# Altium PCB TS4.PcbDoc
Units mm, origin at the board's own origin, x right, y up, seen from the top; angles counter-clockwise.
Board outline 32.65 x 73.25 mm, 2 copper layers (Top Layer, Bottom Layer), stack 0.325 mm thick; 120 components, 74 nets, 374 pads, 130 vias.
Unrouted connection lines stored in the file: 2.
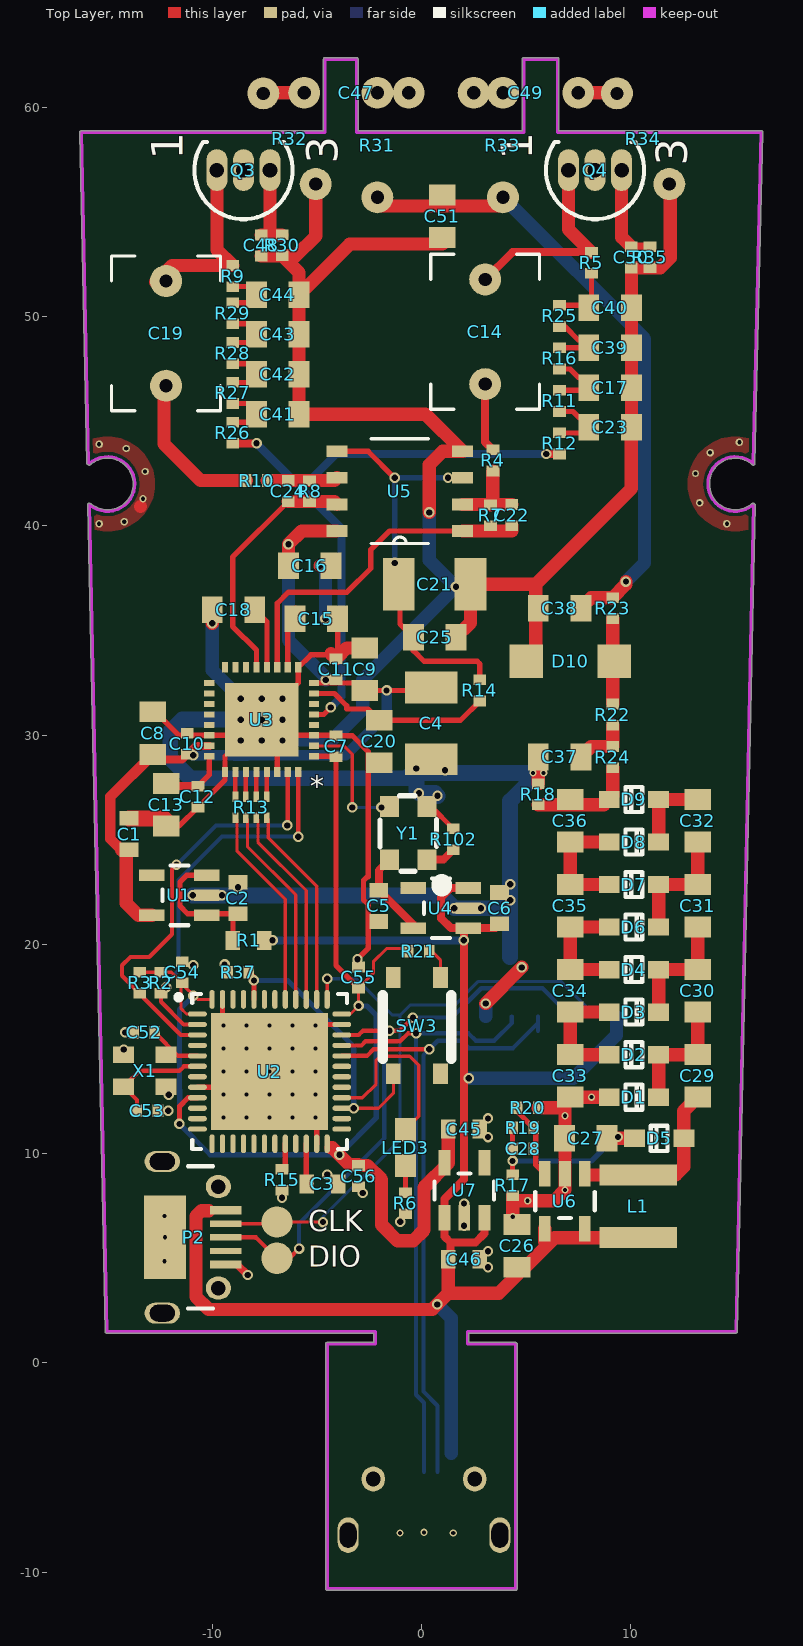
[diagram p0: Top Layer view]
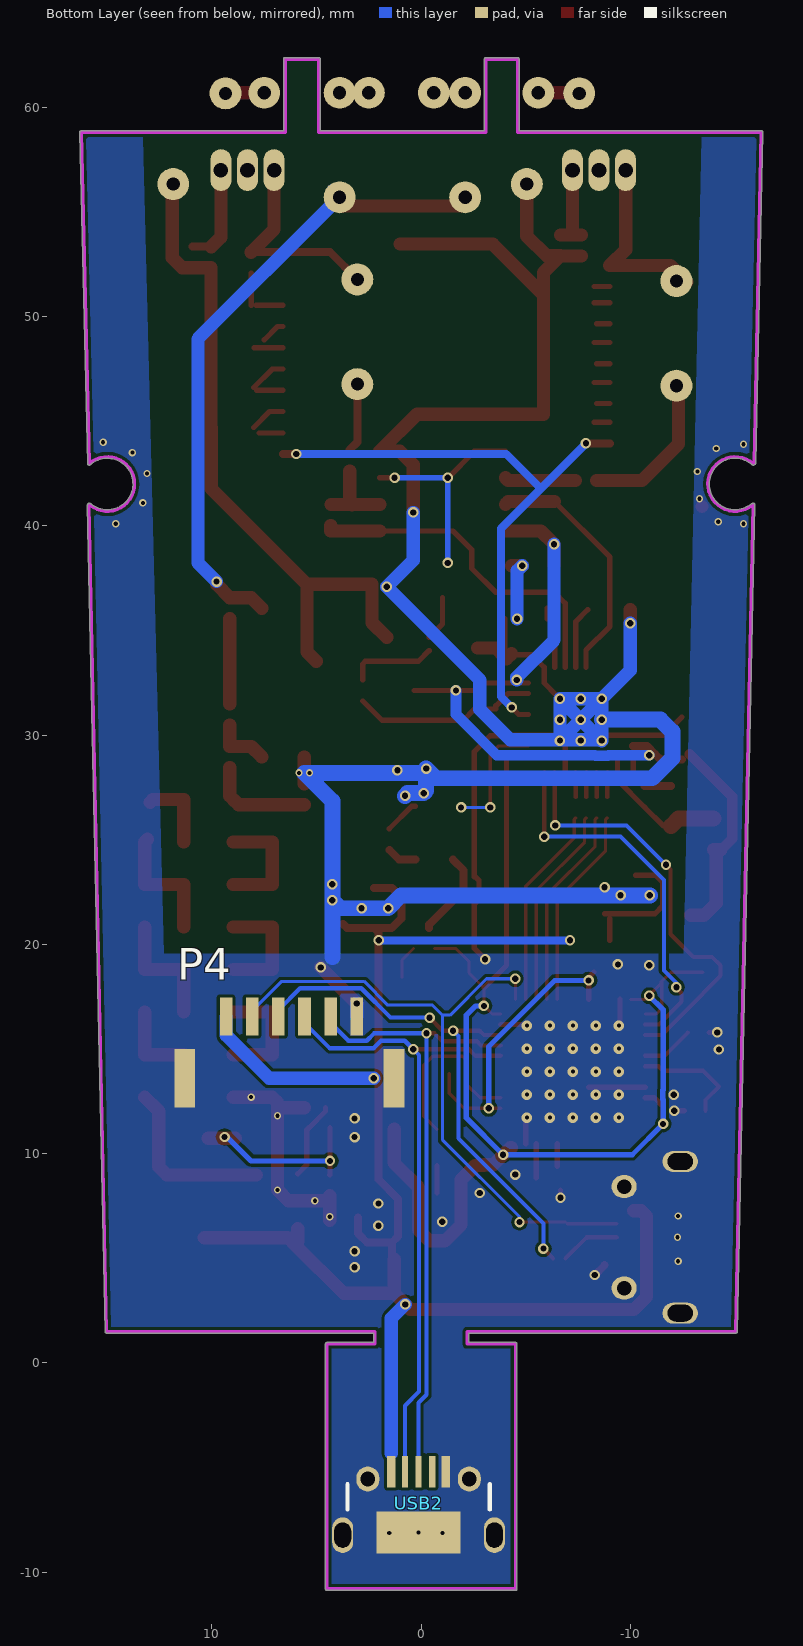
[diagram p1: Bottom Layer view, seen from below]

## Layer stack, top to bottom
Top Solder: solder mask 0.0102, Solder Resist, Dk 3.5
Top Layer: signal copper 0.0356
Dielectric 1: core 0.254, FR-4, Dk 4.2
Bottom Layer: signal copper 0.0356
Bottom Solder: solder mask 0.0102, Solder Resist, Dk 3.5

## Board outline
-4.577,0.9 cw(c-4.5,0.9) -4.5,0.977 -2.277,0.977 -2.277,1.423 -15.032,1.423 cw(c-15.032,1.5) -15.108,1.499 -15.108,1.498 -15.108,1.499 -15.948,41.001 cw(c-15.871,41.003) -15.83,41.067 cw(c-15.829,40.99) -15.78,41.049 ccw(c-15,42) -13.77,42 ccw(c-15,42) -15.812,42.924 cw(c-15.862,42.981) -15.915,42.926 cw(c-15.907,43.002) -15.983,43 -16.33,58.798 cw(c-16.254,58.8) -16.254,58.877 -4.677,58.877 -4.677,62.3 cw(c-4.6,62.3) -4.6,62.377 -3.1,62.377 cw(c-3.1,62.3) -3.023,62.3 -3.023,58.877 4.823,58.877 4.823,62.3 cw(c4.9,62.3) 4.9,62.377 6.5,62.377 cw(c6.5,62.3) 6.577,62.3 6.577,58.877 16.246,58.877 cw(c16.246,58.8) 16.323,58.8 cw(c16.246,58.8) 16.323,58.798 cw(c16.246,58.8) 16.323,58.798 15.939,42.98 ccw(c15.862,42.981) 15.939,42.981 15.939,42.98 15.939,42.979 ccw(c15.862,42.981) 15.939,42.98 15.939,42.979 cw(c15.862,42.981) 15.812,42.924 ccw(c15,42) 15.789,41.056 cw(c15.838,40.998) 15.856,41.072 cw(c15.871,40.997) 15.948,40.997 cw(c15.871,40.997) 15.948,40.995 15.108,1.499 ccw(c15.032,1.5) 15.108,1.5 15.108,1.499 15.108,1.498 15.108,1.499 cw(c15.032,1.5) 15.032,1.423 2.277,1.423 2.277,0.977 4.5,0.977 cw(c4.5,0.9) 4.577,0.9 4.577,-10.795 cw(c4.5,-10.795) 4.5,-10.872 -4.5,-10.872 cw(c-4.5,-10.795) -4.577,-10.795

## Design rules (kind name [scope] priority, off if disabled: settings)
Clearance Clearance_1 [(InNamedPolygon('Bottom Layer-No Net')) vs Not InNet('GND')] p1: gap=0.381 ignorepadtopadclearanceinfootprint=FALSE except(0: Arc-Hole Track-Hole SMDPad-Hole THPad-Hole Via-Hole Fill-Hole Poly-Hole Region-Hole Text-Hole)
Clearance [All] p2: gap=0.152 ignorepadtopadclearanceinfootprint=FALSE except(0: Arc-Hole Track-Hole SMDPad-Hole THPad-Hole Via-Hole Fill-Hole Poly-Hole Region-Hole Text-Hole)
DiffPairsRouting [All] p1: maxlimit=0.254 minlimit=0.254 mostfreqgap=0.254 toplayer_minwidth=0.152 toplayer_maxwidth=0.381 toplayer_prefwidth=0.381 bottomlayer_minwidth=0.152 bottomlayer_maxwidth=0.381 bottomlayer_prefwidth=0.381 maxuncoupledlength=12.7
HoleSize [All] p1: absolutevalues=TRUE maxlimit=3.048 minlimit=0.025 maxpercent=80.000 minpercent=20.000
MinimumSolderMaskSliver [All] p1 off: minsoldermaskwidth=0.254
PlaneClearance [All] p1: clearance=0.254
PlaneConnect [All] p1: planeconnectstyle=Direct reliefexpansion=0.508 reliefentries=4 reliefconductorwidth=0.254 reliefairgap=0.254
PolygonConnect [All] p1: connectstyle=Direct reliefconductorwidth=0.254 reliefentries=4 polygonreliefangle="90 Angle" airgapwidth=0.254
RoomDefinition POL&JFET [InComponentClass('POL&JFET')] p1 off: confinementstyle=ConfineIn formatcopy=TRUE lockcomponents=FALSE outline 17.844,-18.462 174.593,-18.462 174.593,-8.712 17.844,-8.712
RoomDefinition audio [InComponentClass('audio')] p2 off: confinementstyle=ConfineIn formatcopy=TRUE lockcomponents=FALSE outline -84.156,6.538 -71.156,6.538 -71.156,16.288 -84.156,16.288
RoomDefinition power [InComponentClass('power')] p3 off: confinementstyle=ConfineIn formatcopy=TRUE lockcomponents=FALSE outline -84.156,24.788 -56.406,24.788 -56.406,32.038 -84.156,32.038
RoomDefinition MCU [InComponentClass('MCU')] p4 off: confinementstyle=ConfineIn formatcopy=TRUE lockcomponents=FALSE outline -71.652,7.294 -12.089,7.294 -12.089,13.39 -71.652,13.39
RoutingVias [All] p1: holewidth=0.305 width=0.508 viastyle="Through Hole" minholewidth=0.3 minwidth=0.5 maxholewidth=0.711 maxwidth=1.27
SilkToBoardRegionClearance [All] p1 off:
SilkToSilkClearance [All] p1 off: silktosilkclearance=0.254
SilkToSolderMaskClearance [IsPad] p1 off: minsilkscreentomaskgap=0.254 clearancetoexposedcopper=TRUE
SolderMaskExpansion [All] p1: expansion=0.102
Width [All] p1: maxlimit=1.524 minlimit=0.152 preferedwidth=0.152
22 further rules are at their usual default settings.

## Classes and differential pairs
component class audio: C7 C8 C9 C10 C11 C12 C13 C14 C15 C16 C17 C18 C19 C20 C21 C22 C23 C24 C25 C39 C40 C41 C42 C43 C44 R2 R3 R4 R5 R7 R8 R9 R10 R11 R12 R14 R16 R25 R26 R27 R28 R29 R102 U3 U5 Y1
component class MCU: C3 C52 C53 C54 C55 C56 LED3 P2 P4 R6 R13 R15 R21 R37 SW3 U2 USB2 X1
component class power: C1 C2 C4 C5 C6 C45 C46 R1 U1 U4 U7
component class POL&JFET: C26 C27 C28 C29 C30 C31 C32 C33 C34 C35 C36 C37 C38 C47 C48 C49 C50 C51 D1 D2 D3 D4 D5 D6 D7 D8 D9 D10 L1 Q3 Q4 R17 R18 R19 R20 R22 R23 R24 R30 R31 R32 R33 R34 R35 U6

## Components (designator, comment, footprint, x,y, rotation, side; value= is the part's Value field where it differs from the comment)
C1 "4.7uF" 0603L -13.97,25.273 r270 top
C2 "4.7uF" 0603L -8.767,22.215 r270 top
C3 "Cap" 0603L -4.728,8.55 r180 top value=4.7uF
C4 "220uF,Tan" 1210 0.472,30.56 r90 top
C5 "4.7uF" 0603L -2.032,21.844 r90 top
C6 "4.7uF" 0603L 3.737,21.727 r270 top
C7 "0.1uF" 0402 -4.074,29.468 r270 top
C8 "4.7uF" 0805 -12.827,30.099 r270 top
C9 "4.7uF" 0805 -2.703,33.151 r270 top
C10 "0.1uF" 0402 -11.186,29.595 r270 top
C11 "0.1uF" 0402 -4.074,33.151 r270 top
C12 "0.1uF" 0402 -10.678,27.055 r90 top
C13 "4.7uF" 0805 -12.192,26.67 r90 top
C14 "10uF" CL21-5mm-1F 3.048,49.276 r90 top
C15 "10uF" 0805 -5.014,35.564 r0 top
C16 "4.7uF" 0805 -5.334,38.1 r180 top
C17 "4.7uF" 0805 9.017,46.609 r180 top
C18 "10uF" 0805 -8.976,35.995 r0 top
C19 "10uF" CL21-5mm-1F -12.2,49.2 r90 top
C20 "4.7uF" 0805 -2.017,29.696 r90 top
C21 "200uF" 1210 0.635,37.211 r180 top
C22 "NC" 0402 4.318,40.513 r90 top
C23 "4.7uF" 0805 9.017,44.704 r180 top
C24 "100k" 0402 -6.36,41.66 r90 top
C25 "4.7uF" 0805 0.635,34.671 r180 top
C26 "2.2uF" 0805 4.572,5.588 r270 top
C27 "2.2uF" 0805 7.866,10.732 r0 top
C28 "470pf" 0402 4.866,10.232 r180 top
C29 "2.2uF" 0805 13.208,13.716 r90 top
C30 "2.2uF" 0805 13.208,17.78 r90 top
C31 "2.2uF" 0805 13.208,21.844 r90 top
C32 "2.2uF" 0805 13.208,25.908 r90 top
C33 "2.2uF" 0805 7.112,13.716 r90 top
C34 "2.2uF" 0805 7.112,17.78 r90 top
C35 "2.2uF" 0805 7.112,21.844 r90 top
C36 "2.2uF" 0805 7.112,25.908 r90 top
C37 "2.2uF" 0805 6.604,28.956 r0 top
C38 "2.2uF" 0805 6.604,36.068 r0 top
C39 "4.7uF" 0805 9.017,48.514 r180 top
C40 "4.7uF" 0805 9.017,50.419 r180 top
C41 "4.7uF" 0805 -6.858,45.339 r180 top
C42 "4.7uF" 0805 -6.858,47.244 r180 top
C43 "4.7uF" 0805 -6.858,49.149 r180 top
C44 "4.7uF" 0805 -6.858,51.054 r180 top
C45 "4.7uF" 0603L 2.042,11.172 r180 top
C46 "4.7uF" 0603L 2.042,4.949 r180 top
C47 "470pF/1nF/2.2nF" CL21-5mm-1A -3.1,60.7 r180 top
C48 "NC" 0402 -7.652,53.403 r270 top
C49 "470pF/1nF/2.2nF" CL21-5mm-1A 5,60.7 r0 top
C50 "NC" 0402 10.033,52.832 r270 top
C51 "2.2uF" 0805 1,54.8 r90 top
C52 "Cap" 0402 -13.251,15.791 r0 top value=20pF
C53 "Cap" 0402 -13.085,12.055 r180 top value=20pF
C54 "Cap" 0402 -11.43,18.669 r270 top value=0.1uF
C55 "Cap" 0402 -3.001,18.422 r270 top value=0.1uF
C56 "Cap" 0402 -3.001,8.922 r90 top value=0.1uF
D1 "Diode 1N4148" LC-SOD-323 10.16,12.7 r180 top
D2 "Diode 1N4148" LC-SOD-323 10.16,14.732 r0 top
D3 "Diode 1N4148" LC-SOD-323 10.16,16.764 r180 top
D4 "Diode 1N4148" LC-SOD-323 10.16,18.796 r0 top
D5 "Diode 1N4148" LC-SOD-323 11.366,10.732 r0 top
D6 "Diode 1N4148" LC-SOD-323 10.16,20.828 r180 top
D7 "Diode 1N4148" LC-SOD-323 10.16,22.86 r0 top
D8 "Diode 1N4148" LC-SOD-323 10.16,24.892 r180 top
D9 "Diode 1N4148" LC-SOD-323 10.16,26.924 r0 top
D10 "D Zener" SMA 7.112,33.528 r0 top
L1 "Inductor Iron Dot" L4015 10.366,5.982 r90 top value=10uH
LED3 "LED0" 0603 -0.758,10.297 r270 top
P2 "SWD_MicroUSB" MICRO-YZX -15.2,6 r270 top
P4 "JTAG-6P" GH1.25-6 6.2,15.1 r180 bottom
Q3 "JFET-N" TO-92 -8.5,57 r90 top
Q4 "JFET-N" TO-92 8.3,57 r90 top
R1 "FB" 0603L -8.255,20.193 r0 top value=0Ohm
R2 "Res2" 0402 -12.446,18.161 r90 top value=10k
R3 "Res2" 0402 -13.462,18.161 r90 top value=10k
R4 "1k" 0402 3.419,43.133 r270 top
R5 "NC" 0402 8.128,52.578 r270 top
R6 "10k" 0402 -0.758,7.63 r270 top value=0Ohm
R7 "100k" 0402 3.302,40.513 r270 top
R8 "NC" 0402 -5.344,41.66 r270 top
R9 "NC" 0402 -9.017,51.943 r270 top
R10 "1k" 0402 -7.874,42.164 r0 top
R11 "250-300R" 0402 6.604,45.974 r270 top
R12 "250-300R" 0402 6.604,43.942 r270 top
R13 "Res*4" 0402X4 -8.138,26.547 r270 top value=200Ohm
R14 "NC" 0402 2.794,32.131 r90 top
R15 "10k" 0402 -6.658,8.753 r270 top value=0Ohm
R16 "250-300R" 0402 6.604,48.006 r270 top
R17 "" 0402 4.366,8.482 r90 top value=10k
R18 "" 0402 5.588,27.178 r270 top value=5M
R19 "" 0402 4.866,11.232 r180 top value=10k
R20 "" 0402 5.08,12.192 r180 top value=10k
R21 "1k" 0402 -0.131,19.675 r180 top value=0Ohm
R22 "" 0402 9.144,30.988 r270 top value=100k
R23 "" 0402 9.144,36.068 r270 top value=1M
R24 "" 0402 9.144,28.956 r270 top value=100k
R25 "250-300R" 0402 6.604,50.038 r270 top
R26 "250-300R" 0402 -9.017,44.45 r270 top
R27 "250-300R" 0402 -9.017,46.355 r270 top
R28 "250-300R" 0402 -9.017,48.26 r270 top
R29 "250-300R" 0402 -9.017,50.165 r270 top
R30 "" 0402 -6.652,53.403 r90 top value=1k
R31 "" R-1G -2.1,58.2 r270 top value=1G
R32 "" R-1G -6.3,58.5 r120 top value=1G
R33 "" R-1G 3.9,58.2 r270 top value=1G
R34 "" R-1G 10.6,58.5 r120 top value=1G
R35 "" 0402 10.922,52.832 r90 top value=1k
R37 "Res2" 0402 -8.751,18.672 r180 top value=10k
R102 "NC" 0402 1.524,25.019 r90 top
SW3 "SW-PB" SW3x4 -0.213,16.119 r90 top
U1 "LP5907" SOT23-5 -11.561,22.342 r90 top
U2 "STM32F401CCU6" STM-UFQFPN48_N -7.251,13.922 r0 top
U3 "ADAU1761" ADAU1761 -7.63,30.738 r180 top
U4 "LP5907" SOT23-5 0.943,21.727 r90 top
U5 "OP-2" SO8 -1.026,41.66 r180 top
U6 "LM27313XMF/NOPB" SOT23-5 6.866,7.732 r180 top value=Value
U7 "LP5907" SOT23-5 2.055,8.24 r0 top
USB2 "USB Micro Type B" MICRO-YZX 0.127,-11.049 r180 bottom
X1 "24.000 KHz 3.2x2.5mm 8-10pf" OSCILLATOR-2.5x2.0 -13.212,13.96 r180 top
Y1 "OSC_40M" TXC_7Q -0.625,25.32 r90 top

## Footprints (in the part's own frame and the unit in brackets; to place one, negate y for a bottom-side part, rotate by r counter-clockwise, add the part's x,y. Pads: shape width x height; smd on the part's side, far side on the other; paste and mask are expansions set on the pad)
0402 [mil] "0402-RES"
  rect 20x24 smd: 1(-19.68,0) 2(20,0)
0402X4 [mm]
  rect 0.5x0.28 smd: 1(-0.5,0.75) 2(-0.5,0.25) 3(-0.5,-0.25) 4(-0.5,-0.75) 5(0.5,-0.75) 6(0.5,-0.25) 7(0.5,0.25) 8(0.5,0.75)
0603 [mil] "0603-RES"
  rect 44x40 smd: 1(-33.46,0) 2(34,0)
  body extent -31,-16 31,16, height 31
0603L [mm]
  rect 0.7x0.9 smd: 1(-0.75,0) 2(0.75,0)
  body extent -0.8,-0.4 0.8,0.4, height 0.8
0805 [mm]
  rect 1x1.27 smd: 1(-1.016,0) 2(1.016,0)
  body extent -1.27,-0.76 1.27,0.76, height 0.8
1210 [mm]
  rect 1.52x2.5 smd: 1(-1.715,0) 2(1.715,0)
ADAU1761 [mm]
  rect 3.5x3.5 smd: 0(0,0)
  rect 0.5x0.3 smd: 1(-2.5,1.75) 2(-2.5,1.25) 3(-2.5,0.75) 4(-2.5,0.25) 5(-2.5,-0.25) 6(-2.5,-0.75) 7(-2.5,-1.25) 8(-2.5,-1.75) 17(2.5,-1.75) 18(2.5,-1.25) 19(2.5,-0.75) 20(2.5,-0.25) 21(2.5,0.25) 22(2.5,0.75) 23(2.5,1.25) 24(2.5,1.75)
  rect 0.3x0.5 smd: 9(-1.75,-2.5) 10(-1.25,-2.5) 11(-0.75,-2.5) 12(-0.25,-2.5) 13(0.25,-2.5) 14(0.75,-2.5) 15(1.25,-2.5) 16(1.75,-2.5) 25(1.75,2.5) 26(1.25,2.5) 27(0.75,2.5) 28(0.25,2.5) 29(-0.25,2.5) 30(-0.75,2.5) 31(-1.25,2.5) 32(-1.75,2.5)
  body extent -2.5,-2.5 2.5,2.5, height 0.8
CL21-5mm-1A [mil]
  round 60 hole 25: 1(-98.43,0) 2(98.43,0)
  body extent -142,-47 142,47, height 394
CL21-5mm-1F [mil]
  round 60 hole 25: 1(-98.43,0) 2(98.43,0)
  silkscreen extent -146,-102 146,102, body extent -142,-98 142,98, height 394
GH1.25-6 [mm]
  rect 1x2.8 smd: 0(-5.1,-1.5) 0(4.9,-1.5)
  rect 0.6x1.8 smd: 1(-3.125,1.45) 2(-1.875,1.45) 3(-0.625,1.45) 4(0.625,1.45) 5(1.875,1.45) 6(3.125,1.45)
  body extent -5.48,-3.1 5.27,1.75, height 4.25
L4015 [mm]
  rect 1x3.7 smd: 1(0,0) 2(3,0)
LC-SOD-323 [mm]
  rect 1x0.83 smd: 1(1.18,0) 2(-1.18,0)
  silkscreen extent -0.4,-0.6 0.4,0.6, body extent -1.35,-0.62 1.35,0.63, height 1.1
MICRO-YZX [mm]
  rect 0.4x1.5 smd: 1(-1.3,5.85) 5(1.3,5.85)
  rect 0.3x1.5 smd: 2(-0.65,5.85) 3(0,5.85) 4(0.65,5.85)
  oval 1x1.7 hole 0.8 slot 1.2 at 90 deg: 5(-3.625,2.82) 5(3.625,2.82)
  oval 1.1x1.2 hole 0.7: 5(-2.425,5.5) 5(2.425,5.5)
  rect 4x2 smd: 5(0,2.95)
  silkscreen extent -3.4,4.05 3.4,5.25, body extent -4.02,0.33 3.98,5.93, height 2.6
OSCILLATOR-2.5x2.0 [mm] "OSCILLATOR-3.2X2.5"
  rect 1x0.8 smd: 1(-1.016,-0.762) 2(1.016,-0.762) 3(1.016,0.762) 4(-1.016,0.762)
  body extent -1.27,-1.02 1.27,1.02, height 0.9
R-1G [mil]
  round 60 hole 25: 1(-98.43,0) 2(98.43,0)
  body extent -142,-47 142,47, height 394
SMA [mm]
  rect 1.6x1.6 smd: 1(-2.1,0) 2(2.1,0)
  body extent -2.1,-1.3 2.1,1.3, height 2.3
SO8 [mm]
  rect 1x0.559 smd: 1(-3,1.905) 2(-3,0.635) 3(-3,-0.635) 4(-3,-1.905) 5(3,-1.905) 6(3,-0.635) 7(3,0.635) 8(3,1.905)
  silkscreen extent -1.37,-2.5 1.37,2.5, body extent -3,-2.45 3,2.45, height 1.63
SOT23-5 [mil] "SOT23-5"
  rect 22x48 smd: 1(-37.4,-51.19) 2(0,-51.19) 3(38,-51.19) 4(38,52) 5(-37.4,52)
  silkscreen extent -56,-17 56,32
STM-UFQFPN48_N [mm] "QFN, 48-Leads, Body 7.1x7.1mm, Pitch 0.5mm, Thermal Pad 5.6x5.6mm, IPC Medium Density"
  oval 0.9x0.25 smd: 1(-3.45,2.75) 2(-3.45,2.25) 3(-3.45,1.75) 4(-3.45,1.25) 5(-3.45,0.75) 6(-3.45,0.25) 7(-3.45,-0.25) 8(-3.45,-0.75) 9(-3.45,-1.25) 10(-3.45,-1.75) 11(-3.45,-2.25) 12(-3.45,-2.75) 25(3.45,-2.75) 26(3.45,-2.25) 27(3.45,-1.75) 28(3.45,-1.25) 29(3.45,-0.75) 30(3.45,-0.25) 31(3.45,0.25) 32(3.45,0.75) 33(3.45,1.25) 34(3.45,1.75) 35(3.45,2.25) 36(3.45,2.75)
  oval 0.25x0.9 smd: 13(-2.75,-3.45) 14(-2.25,-3.45) 15(-1.75,-3.45) 16(-1.25,-3.45) 17(-0.75,-3.45) 18(-0.25,-3.45) 19(0.25,-3.45) 20(0.75,-3.45) 21(1.25,-3.45) 22(1.75,-3.45) 23(2.25,-3.45) 24(2.75,-3.45) 37(2.75,3.45) 38(2.25,3.45) 39(1.75,3.45) 40(1.25,3.45) 41(0.75,3.45) 42(0.25,3.45) 43(-0.25,3.45) 44(-0.75,3.45) 45(-1.25,3.45) 46(-1.75,3.45) 47(-2.25,3.45) 48(-2.75,3.45)
  rect 5.6x5.6 smd: 49(0,0)
  silkscreen extent -4.47,-3.7 3.7,3.7, body extent -3.55,-3.55 3.55,3.55, height 0.6
SW3x4 [mm]
  rect 1x0.7 smd: 1(-2.3,1.125) 2(2.3,-1.125) 3(2.3,1.125) 4(-2.3,-1.125)
  silkscreen extent -1.58,-1.65 1.45,1.63, body extent -2,-1.5 2,1.5, height 2.6
TO-92 [mm] "TO, Flat Index; 3 In-Line, Axial Leads; Body Dia. 4.6mm; Leads 0.41 x 0.39 mm (max)"
  oval 2x1 hole 0.7: 1(0,1.27) 2(0,0) 3(0,-1.27)
  silkscreen extent -2.34,-2.34 1.35,2.34
TXC_7Q [mm]
  rect 1x0.9 smd: 1(-1.275,-0.9) 2(1.275,-0.9) 3(1.275,0.9) 4(-1.275,0.9)
  silkscreen extent -2.52,-1.6 1.78,1.35

## Part data
C1 C2 C4 C5 C6 C7 C8 C9 C10 C11 C12 C13 C14 C15 C16 C17 C18 C19 C20 C21 C22 C23 C24 C25 C39 C40 C41 C42 C43 C44 C45 C46 C47 C48 C49 C50: library part Cap, "Capacitor", LatestRevisionDate=17-Jul-2002, LatestRevisionNote="Re-released for DXP Platform.", PackageDescription="Radial Cap, Thru-Hole; 2 Leads; 0.3 in Pin Spacing", PackageReference=RAD-0.3, Published=8-Jun-2000, Publisher="Altium Limited"
C3 C52 C53 C54 C55 C56: "Capacitor", LatestRevisionDate=17-Jul-2002, LatestRevisionNote="Re-released for DXP Platform.", PackageDescription="Radial Cap, Thru-Hole; 2 Leads; 0.3 in Pin Spacing", PackageReference=RAD-0.3, Published=8-Jun-2000, Publisher="Altium Limited"
C26 C27 C28 C29 C30 C31 C32 C33 C34 C35 C36 C37 C38 C51: library part CAP0402-CAP, "<b>Capacitor</b> / Standard 0603 ceramic capacitor, and 0.1\" leaded capacitor.", PARTNO=CC0402ZRY5V7BB104
D1 D2 D3 D4 D5 D6 D7 D8 D9: "High Conductance Fast Diode", Code_JEDEC=DO-204-AH, ComponentLink1Description="Manufacturer Link", ComponentLink1URL=http://www.fairchildsemi.com/, ComponentLink2Description=Datasheet, ComponentLink2URL=http://www.fairchildsemi.com/ds/1N%2F1N4148.pdf, DatasheetVersion=1997, LatestRevisionDate=17-Jul-2002, LatestRevisionNote="Re-released for DXP Platform.", PackageDescription="Diode, Axial; Body 3.8 x 1.9 mm (LxDia. max), Lead Dia. 0.53 mm (max)", PackageReference=DO-35, Published=8-Jun-2000, Publisher="Altium Limited"
D10: "Zener Diode", LatestRevisionDate=17-Jul-2002, LatestRevisionNote="Re-released for DXP Platform.", PackageDescription="Diode, Thru-Hole; 2 Leads; 0.7 in Pin Spacing", PackageReference=DIODE-0.7, Published=8-Jun-2000, Publisher="Altium Limited"
L1: "Magnetic-Core Inductor with Winding Polarity Marking", LatestRevisionDate=17-Jul-2002, LatestRevisionNote="Re-released for DXP Platform.", PackageDescription="Diode; 2 Leads", PackageReference=DIODE_SMC, Published=24-Mar-1999, Publisher="Altium Limited"
LED3: "Typical INFRARED GaAs LED", LatestRevisionDate=08-Jul-2005, LatestRevisionNote="Mech Layer 1 removed.", PackageDescription="LED; 2 Leads", PackageReference=LED-0, Published=8-Jun-2000, Publisher="Altium Limited"
P2: "Connector SMD USB Micro Type B middle mount", Manufacturer 1="Molex Inc", Package / Case=SMD, Supplier Part Number 1=WM17142CT-ND, SCDType=undef, Supplier 1=Digi-Key
Q3 Q4: "N-Channel JFET", Code_JEDEC=TO-254-AA, LatestRevisionDate=17-Jul-2002, LatestRevisionNote="Re-released for DXP Platform.", PackageReference=TO-254-AA, Published=8-Jun-2000, Publisher="Altium Limited"
R1 R4 R5 R6 R7 R8 R9 R10 R11 R12 R14 R15 R16 R17 R18 R19 R20 R21 R22 R23 R24 R25 R26 R27 R28 R29 R30 R31 R32 R33 R34 R35 R102: library part Res2, "Resistor", LatestRevisionDate=17-Jul-2002, LatestRevisionNote="Re-released for DXP Platform.", PackageDescription="Axial Device, Thru-Hole; 2 Leads; 0.4 in Pin Spacing", PackageReference=AXIAL-0.4, Published=8-Jun-2000, Publisher="Altium Limited"
R2 R3 R13 R37: "Resistor", LatestRevisionDate=17-Jul-2002, LatestRevisionNote="Re-released for DXP Platform.", PackageDescription="Axial Device, Thru-Hole; 2 Leads; 0.4 in Pin Spacing", PackageReference=AXIAL-0.4, Published=8-Jun-2000, Publisher="Altium Limited"
SW3: "Switch", LatestRevisionDate=17-Jul-2002, LatestRevisionNote="Re-released for DXP Platform.", PackageDescription="Switch; 2 Leads", PackageReference=SPST-2, Published=24-Mar-1999, Publisher="Altium Limited"
U2: "ARM Cortex-M4 32-bit MCU+FPU, 105 DMIPS, 256 kB Flash, 64 kB Internal RAM, 36 I/Os, 48-pin UFQFPN, -40 to 85 degC, Tray", I/Os (High Current)=36, Manufacturer=STMicroelectronics, Operating Frequency(F) (Processor speed) (MHz)=84, Supplier Part Number 1=19X6217, Supply Voltage(Vcc) max (V)=3.6, Supply Voltage(Vcc) min (V)=1.8, ComponentLink1Description="Manufacturer URL", ComponentLink1URL=http://www.st.com/web/en/home.html, ComponentLink2Description=Datasheet, ComponentLink2URL=http://www.st.com/st-web-ui/static/active/en/resource/technical/document/data_brief/DM00071938.pdf, ComponentLink3Description="Package Specification", ComponentLink3URL=http://www.st.com/st-web-ui/static/active/en/resource/technical/document/data_brief/DM00071938.pdf, Core="ARM Cortex-M4", DatasheetVersion="Rev. 1", FLASH Size (Prog) (kB)=256, Internal RAM Size (kB)=64, Mounting Technology="Surface Mount", PackageDescription="48-Pin Ultra Thin Fine Pitch Quad Flat No-Lead, 7 x 7 x 0.6 mm Body, 0.5 mm Pitch, Exposed Pad", PackageReference=UFQFPN48, PackageVersion="Rev. 1, 04/2013", Packing=Tray, PartNumber=STM32F401CCU6, Supplier 1=Newark, Supplier 2=Mouser, Supplier Part Number 2=511-STM32F401CCU6
U6: "Imported", Manufacturer="Texas Instruments", CompType=IC, MountType=SMT, PackageReference=DBV0005A, PartNumber=LM27313XMF/NOPB, PIN_COUNT=5, RefDes=RefDes, RoHS=Y, Type=DEV
USB2: library part USB_Micro_TypeB, "Connector SMD USB Micro Type B middle mount", Manufacturer 1="Molex Inc", Manufacturer Part Number 1=47491-0001, Package / Case=SMD, Supplier Part Number 1=WM17142CT-ND, SCDType=undef, Supplier 1=Digi-Key
X1: library part OSCILLATOR-3.2X2.5, "Crystal Oscillator in 3.2x2.5 SMD"

## Free pads (board coordinates)
  round 1.5 smd: 0(-6.9,6.731) 8(-6.9,5)

## Via types
v1: diameter 0.5, hole 0.3, Top Layer to Bottom Layer, 81 vias
v2: diameter 0.5, hole 0.2, Top Layer to Bottom Layer, 25 vias
v3: diameter 0.35, hole 0.2, Top Layer to Bottom Layer, 24 vias

## Nets (pads, with @x,y where several pads share a name; then routed paths per layer and width w, separated by ;. In a path a pad name is that pad's centre, name@x,y a point inside that pad or via, vN(x,y) a via of type N, cw(c..) or ccw(c..) an arc to the next point about the centre after c; other vN are vias at no path point)
3.3A: C1.2 C4.2 C8.2 C9.2 C10.2 C11.2 C16.2 U1.5 U3.8 U3.23 U5.8 | length 39.5
  Top Layer w0.254: U3.8 C9.2@-3.157,32.488 ; C9.2 v1(-1.661,32.135) C4.2@0.332,32.135
  Top Layer w0.381: C8.2@-12.456,28.833 -11.44,28.833 C10.2 -10.785,29.488 U3.23
  Top Layer w0.508: C1.2@-14.332,24.523 -14.859,25.05 -14.859,27.051 C8.2
  Top Layer w0.635: C1.2@-14.332,24.523 C1.2 ; C1.2@-14.097,24.396 -14.097,21.971 -13.518,21.392 U1.5 ; C16.2 v1(-6.35,39.116) -5.711,39.755 U5.8
  Bottom Layer w0.508: v1(-10.9,29.036) -8.952,29.036 -8.93,29.014 -8.33,29.014 -8.308,29.036 -3.617,29.036 -1.661,30.992 v1(-1.661,32.135)
  Bottom Layer w0.635: v1(-6.35,39.116) -6.35,34.544 -4.572,32.766 v1(-4.572,32.639)
3.3Clock: C5.2 U4.5 Y1.4 | length 4.2
  Top Layer w0.381: Y1.4 -2.032,23.538 C5.2 -0.377,20.939 U4.5
3.3D: C7.2 C45.2 C54.2 C55.2 C56.2 R2.2 R3.2 R21.2 U2.1 U2.9 U2.24 U2.36 U2.48 U3.1 U7.5 | length 63.5
  Top Layer w0.152: R3.2 R2.2 -11.938,18.669 C54.2 ; U2.1 -11.225,16.672 -11.493,16.94 -11.493,18.172 -10.693,17.372 U2.48 ; U2.36 -3.388,16.672 v1(-3.001,17.059) C55.2 -2.29,18.625 -2.29,19.167 -1.655,19.802 R21.2@-0.639,19.802
  Top Layer w0.254: v1(-11.561,11.42) -11.561,12.258 -11.147,12.672 U2.9 ; U3.1 C7.2@-4.102,28.988 ; C7.2 -4.074,18.987 C55.2 ; U7.5 C45.2@1.105,10.985
  Top Layer w0.635: -4.318,10.287 -4.256,10.287 v1(-3.915,9.947) -3.438,9.47 -3.001,9.47 C56.2 -2.572,9.43 -1.905,8.763 -1.905,6.604 -1.143,5.842 -0.381,5.842 0.127,6.35 0.127,8.382 1.292,9.547 C45.2
  Bottom Layer w0.254: v1(-10.9,17.541) -11.561,16.881 -11.561,13.057 -11.539,13.036 -11.539,12.598 -11.561,12.576 v1(-11.561,11.42) -10.087,9.947 v1(-3.915,9.947) -2.159,11.703 -2.159,16.623 -2.595,17.059 v1(-3.001,17.059)
5V: C6.2 C26.2 C46.2 L1.1 P2.1 P4.1 R1.2 U4.1 U4.3 U6.4 U6.5 U7.1 U7.3 USB2.1 | length 79.6
  Top Layer w0.381: C46.2@1.402,5.059 1.402,5.742 ; U4.3 1.401,22.692 0.943,22.235 0.943,21.245 1.411,20.777 U4.1 ; U7.3 3.02,6.182 2.581,5.742 1.402,5.742 ; C6.2 3.537,20.777 U4.1 ; 1.402,5.742 1.105,6.039 U7.1 1.105,7.836 2.032,8.763 v1(2.032,20.193) 2.032,20.566 U4.1
  Top Layer w0.635: -10.16,7.27 -10.51,7.27 -10.77,7.01 -10.77,3.153 -10.172,2.555 0.523,2.555 v1(0.762,2.794) 1.292,3.324 ; C46.2 1.292,3.324 ; U6.4 5.901,5.783 6.032,5.651 ; L1.1 6.363,5.982 6.032,5.651 ; 1.292,3.324 3.705,3.324 6.032,5.651
  Bottom Layer w0.381: v1(-7.112,20.193) v1(2.032,20.193)
  Bottom Layer w0.635: v1(0.762,2.794) 1.427,2.129 1.427,-4.318 ; v1(2.27,13.6) 7.265,13.6 9.325,15.66 P4.1
120V: C38.2 C51.2 R23.1 R31.2 R33.2 | length 30.2
  Top Layer w0.635: R31.2@-1.9,55.285 R33.2@3.8,55.285 ; C38.2 8.12,36.568 R23.1 9.779,37.203 v1(9.779,37.338)
  Bottom Layer w0.635: R33.2@4.219,56.019 4.219,55.381 10.668,48.932 10.668,38.227 v1(9.779,37.338)
BIASA: C40.2 R5.2 R25.1 | length 2.8
  Top Layer w0.254: R25.1 C40.2@7.882,50.538 ; C40.2@8.128,50.546 R5.2
BIASB: C44.2 R9.2 R29.1 | length 1.5
  Top Layer w0.254: R29.1 C44.2@-8.263,50.665 ; R9.2 C44.2@-8.255,51.435
CM: C21.2 C25.2 R14.2 U5.3 U5.5 | length 17
  Top Layer w0.254: U5.5 -2.544,43.565 v1(-1.274,42.295) ; C21.2@-1.016,36.576 -1.016,35.306 C25.2 ; C25.2@-0.381,34.036 0.127,33.528 2.667,33.528 2.794,33.401 R14.2 ; v1(1.274,42.295) U5.3
  Bottom Layer w0.254: v1(-1.27,38.227) -1.274,38.231 v1(-1.274,42.295) v1(1.274,42.295)
GND: C1.1 C2.1 C3.1 C4.1 C5.1 C6.1 C7.1 C8.1 C9.1 C10.1 C11.1 C12.1 C13.1 C15.2 C16.1 C17.1 C18.1 C20.1 C21.1 C23.1 C25.1 C26.1 C27.1 C33.1 C37.1 C38.1 C39.1 C40.1 C41.1 C42.1 C43.1 C44.1 C45.1 C46.1 C48.2 C50.2 C51.1 C52.1 C53.1 C54.1 C55.1 C56.1 D1.1 D10.1 P2.5 P4.0 P4.6 R6.2 R15.2 R17.1 R18.1 R20.1 R30.1 R32.1 R34.1 R35.1 R37.2 R102.2 U1.2 U2.8 U2.23 U2.35 U2.47 U2.49 U3.0 U3.3 U3.9 U3.22 U3.25 U3.30 U4.2 U5.4 U6.2 U7.2 USB2.5 X1.2 X1.4 Y1.2 | length 215.5
  Top Layer w0.254: v1(-14.154,15.791) C52.1 ; C53.1 v1(-12.094,12.055) ; C8.1@-12.456,30.865 -11.579,29.988 U3.22 U3.0@-8.38,29.988 ; C13.1 -11.938,25.654 -11.579,25.654 C12.1 -9.38,27.853 U3.25 U3.0@-9.38,28.988 ; U2.8 U2.49@-8.001,13.172 ; U2.49@-9.501,16.172 U2.47 ; U3.30 U3.0@-6.88,29.988 ; v1(-6.658,7.889) R15.2 ; U3.0@-6.474,29.988 U3.3 -4.094,29.988 C7.1 -3.298,29.968 -2.54,29.21 -2.54,23.223 -2.598,23.223 -2.761,23.06 -2.761,22.128 -2.598,21.965 -2.54,21.965 -2.54,19.805 v1(-3.052,19.294) ; U3.0@-6.474,30.738 -6.474,31.894 -5.88,32.488 U3.9 -5.281,33.836 -4.481,33.836 ; U2.23 U2.49@-5.001,11.672 ; U2.49@-5.001,16.172 U2.35 ; C11.1 -3.998,33.727 C15.2 ; Y1.2 0.456,26.595 R102.2
  Top Layer w0.381: P2.5@-8.769,4.669 v1(-8.3,4.2)
  Top Layer w0.635: v1(-9.992,35.347) C18.1 ; C48.2 -6.66,52.895 R30.1 ; R32.1 -5.05,53.85 -5.997,52.903 R30.1 ; v1(-4.826,38.1) C16.1 ; C11.1@-4.318,33.894 C11.1 ; C11.1@-3.998,33.727 -3.558,34.167 C9.1 ; v1(0.381,40.64) 0.381,42.926 1.02,43.565 U5.4 0.199,45.339 C41.1 C42.1 C43.1 C44.1 ; C51.1@1,53.467 -3.429,53.467 C44.1 ; C25.1 2.35,35.37 C21.1 5.461,37.211 ; v1(3.075,17.175) v1(4.8,18.9) ; C26.1@4.366,6.81 R17.1 ; R17.1@4.572,7.747 6.35,7.747 v3(6.866,8.263) U6.2 6.866,12.454 C33.1 D1.1 ; D10.1 5.461,33.977 5.461,37.211 ; R20.1 6.604,12.192 ; R18.1 C37.1 ; R34.1@11.62,56.135 11.9,55.855 11.9,52.819 11.413,52.332 R35.1 10.041,52.332 10.041,44.712 C23.1 10.033,41.783 5.461,37.211 ; R30.1 -5.842,52.093 C44.1
  Top Layer w0.762: C1.1 -12.307,26.023 C13.1@-11.938,25.654
  Bottom Layer w0.635: v1(-9.992,35.347) -9.992,33.1 v1(-8.63,31.738) ; v1(-8.63,29.738) v1(-6.63,31.738) ; v1(-4.826,38.1) -4.582,37.856 v1(-4.582,35.564) ; v1(0.381,40.64) 0.381,38.354 v1(1.651,37.084) -2.794,32.639 -2.794,31.242 -4.251,29.785 v1@-6.63,29.785 ; P4.6 v1(3.075,17.175) ; v1(-8.63,31.738) v1(-7.63,31.738) v1(-6.63,31.738) ; v1(-8.63,31.738) v1(-8.63,30.738) -8.63,29.785 v1@-6.678,29.785 ; v1(-8.63,31.738) v1(-7.63,30.738) v1@-6.678,29.785 ; v1@-6.678,29.785 v1@-6.63,29.785 ; v1@-6.63,29.785 v1(-6.63,30.738) v1(-6.63,31.738)
  Bottom Layer w0.762: v1(-10.926,22.342) v1(-9.529,22.342) 0.964,22.342 v1(1.578,21.727) v1(2.848,21.727) 3.864,21.727 v1(4.245,22.108) ; v1(-8.63,30.738) -11.426,30.738 -12,30.164 -12,28.9 -11.04,27.94 -0.7,27.94 v1(-0.239,28.401) ; v1(0.772,27.098) 0.645,27.225 v1(-0.117,27.225) -0.239,27.347 v1(-0.239,28.401) ; 4.245,19.4 v1(4.245,22.108) ; v1(-0.239,28.401) -0.032,28.194 v3(5.334,28.194) 5.588,28.194 4.245,26.851 v1(4.245,22.87) v1(4.245,22.108)
  other v1: 3.185,4.568 3.185,5.33 2.042,6.55 -1.012,6.741 2.042,7.616 -2.798,8.118 -4.5,9 3.185,10.791 3.185,11.68 -12.069,12.817 -14.228,14.976 -10.9,19 -9.402,19.04 -8.763,22.733 1.133,28.325 -7.63,29.738 -6.63,29.738
  other v2: -9.451,11.722 -8.351,11.722 -7.251,11.722 -6.151,11.722 -5.051,11.722 -9.451,12.822 -8.351,12.822 -7.251,12.822 -6.151,12.822 -5.051,12.822 -9.451,13.922 -8.351,13.922 -7.251,13.922 -6.151,13.922 -5.051,13.922 -9.451,15.022 -8.351,15.022 -7.251,15.022 -6.151,15.022 -5.051,15.022 -9.451,16.122 -8.351,16.122 -7.251,16.122 -6.151,16.122 -5.051,16.122
  other v3: -1.016,-8.128 1.524,-8.128 0.127,-8.099 -12.279,4.857 -12.25,6 4.366,6.985 -12.279,7.016 5.08,7.747 6.866,11.811 8.128,12.7 5.842,28.194 -15.4,40.1 14.6,40.1 -14.2,40.2 13.3,41.1 -13.3,41.3 13.1,42.5 -13.2,42.6 13.8,43.5 -14.1,43.7 -15.4,43.9 15.2,44
KEY: R37.1 SW3.1 U2.27 U2.44 | length 14.1
  Top Layer w0.152: U2.27 v1(-3.23,12.172) -2.046,12.172 -1.338,12.88 SW3.1
  Top Layer w0.254: R37.1 -8.001,18.422 v1(-8.001,18.278) U2.44
  Bottom Layer w0.254: v1(-8.001,18.278) -6.384,18.278 -3.23,15.123 v1(-3.23,12.172)
MICBIAS: R12.2 R26.2 U3.5 | length 29.6
  Top Layer w0.254: U3.5 -4.662,30.988 v1(-4.328,31.322)
  Top Layer w0.381: R26.2 v1(-7.874,43.942) ; v1(5.969,43.434) R12.2
  Bottom Layer w0.381: v1(-7.874,43.942) -3.81,39.878 -3.81,31.84 -3.812,31.838 ; -5.715,41.783 -4.064,43.434 v1(5.969,43.434) ; v1(-4.328,31.322) v1@-4.159,31.491 ; v1@-4.159,31.491 -3.812,31.838
NetC2_2: C2.2 R1.1 U1.1 U1.3 | length 6.5
  Top Layer w0.254: U1.3 -11.205,23.307 -11.535,22.977 -11.535,21.834 -11.166,21.465 C2.2 ; R1.1 C2.2@-9.005,21.226
NetC3_2: C3.2 U2.22 | length 1.6
  Top Layer w0.254: C3.2@-5.501,8.854 U2.22
NetC12_2: C12.2 C13.2 U3.24 | length 2.9
  Top Layer w0.254: C12.2 -10.13,28.111 U3.24
  Top Layer w0.381: C13.2@-11.948,27.563 C12.2
NetC14_1: C14.1 R4.1 | length 3.3
  Top Layer w0.381: C14.1 3.048,44.004 R4.1
NetC14_2: C14.2 Q4.1 R5.1 | length 10.1
  Top Layer w0.381: C14.2 4.35,53.078 R5.1 R5.1@8.194,53.144
  Top Layer w0.635: Q4.1 7.03,54.176 R5.1
NetC15_1: C15.1 U3.10 | length 2.6
  Top Layer w0.254: U3.10 C15.1@-6.38,35.34 ; C15.1 C15.1@-6.03,36.072
NetC17_2: C17.2 R11.1 R16.2 | length 3
  Top Layer w0.254: R11.1 C17.2@7.866,46.474 ; R16.2 7.112,47.498 C17.2
NetC18_2: C18.2 U3.12 | length 3
  Top Layer w0.254: C18.2 -7.38,35.415 U3.12
NetC19_1: C19.1 R10.1 | length 7
  Top Layer w0.635: C19.1@-12.3,46.249 -12.3,43.923 -10.541,42.164 R10.1
NetC19_2: C19.2 Q3.1 R9.1 | length 8.9
  Top Layer w0.635: C19.2@-12.7,51.649 -11.906,52.443 R9.1 -9.77,53.196 Q3.1
NetC20_2: C20.2 R14.1 U3.7 | length 8.9
  Top Layer w0.254: U3.7 -4.156,31.988 -3.566,31.398 -3.566,31.246 -2.55,31.246 C20.2 1.875,30.712 R14.1
NetC22_1: C22.1 R7.2 U3.11 U5.1 | length 16.5
  Top Layer w0.254: U3.11 -6.88,36.3 -6.35,36.83 -3.556,36.83 -2.413,37.973 -2.413,38.862 -1.52,39.755 U5.1
  Top Layer w0.635: U5.1 4.314,39.755 4.318,39.758 C22.1
NetC22_2: C22.2 R4.2 R7.1 U5.2 | length 4
  Top Layer w0.635: U5.2 R7.1@3.314,41.025 ; R7.1 R7.1@3.314,41.025 ; R4.2 3.419,41.13 R7.1@3.314,41.025 ; C22.2@4.314,41.025 R7.1@3.314,41.025
NetC23_2: C23.2 R11.2 R12.1 | length 2.8
  Top Layer w0.254: R12.1 C23.2@7.739,44.442 ; R11.2 7.239,45.466 C23.2
NetC24_1: C24.1 R8.2 U3.13 U5.7 | length 11.9
  Top Layer w0.254: U3.13 -7.88,34.061 -9.017,35.198 -9.017,38.503 C24.1
  Top Layer w0.635: C24.1 -4.161,41.16 U5.7
NetC24_2: C24.2 R8.1 R10.2 U5.6 | length 3.4
  Top Layer w0.635: R10.2 -4.157,42.164 U5.6
NetC27_2: C27.2 C28.2 D5.2 R17.2 R19.2 | length 9.1
  Top Layer w0.254: R19.2 C28.2 v1(4.358,9.652) 4.358,8.998 R17.2
  Top Layer w0.635: C27.2 D5.2
  Bottom Layer w0.254: v1(4.358,9.652) 8.128,9.652 9.271,10.795 v1(9.398,10.795)
NetC28_1: C28.1 R19.1 R20.2 U6.3 | length 3.7
  Top Layer w0.254: R20.2 4.572,12.026 R19.1 5.461,11.137 5.461,9.472 U6.3
NetC29_2: C29.2 C30.1 D1.2 D2.1 | length 5.9
  Top Layer w0.635: D1.2 D2.1 C29.2 C30.1
NetC30_2: C30.2 C31.1 D3.2 D4.1 | length 5.9
  Top Layer w0.635: D3.2 D4.1 C30.2 C31.1
NetC31_2: C31.2 C32.1 D6.2 D7.1 | length 6.1
  Top Layer w0.635: D6.2 D7.1 C31.2 C32.1 C32.1@13.081,25.019
NetC32_2: C32.2 D8.2 D9.1 | length 3.7
  Top Layer w0.635: D8.2 D9.1 12.827,26.924 C32.2@12.954,26.797
NetC33_2: C33.2 C34.1 D2.2 D3.1 | length 5.8
  Top Layer w0.635: D2.2 C33.2 C34.1 D3.1
NetC34_2: C34.2 C35.1 D4.2 D6.1 | length 5.8
  Top Layer w0.635: D4.2 C34.2 C35.1 D6.1
NetC35_2: C35.2 C36.1 D7.2 D8.1 | length 5.8
  Top Layer w0.635: D7.2 C35.2 C36.1 D8.1
NetC36_2: C36.2 D9.2 R18.2 R24.2 | length 4.9
  Top Layer w0.635: R18.2 8.726,26.67 D9.2 ; D9.2@9.144,27.088 R24.2
NetC37_2: C37.2 R22.2 R24.1 | length 2.8
  Top Layer w0.635: C37.2 8.12,29.456 R24.1 R22.2
NetC39_2: C39.2 R16.1 R25.2 | length 2.5
  Top Layer w0.254: R16.1 C39.2@7.993,48.506 ; R25.2 6.858,49.53 7.493,48.895
NetC41_2: C41.2 R26.1 R27.2 | length 1.4
  Top Layer w0.254: R26.1 C41.2@-8.263,44.95 ; R27.2 -8.382,45.847
NetC42_2: C42.2 R27.1 R28.2 | length 1.4
  Top Layer w0.254: R27.1 C42.2@-8.263,46.855 ; R28.2 -8.382,47.752
NetC43_2: C43.2 R28.1 R29.2 | length 1.4
  Top Layer w0.254: R28.1 C43.2@-8.263,48.76 ; R29.2 -8.382,49.657
NetC47_1: C47.1 R31.1
NetC47_2: C47.2 Q3.2 R32.2 | length 2
  Top Layer w0.635: R32.2 -7.515,60.7 C47.2
NetC48_1: C48.1 Q3.3 R30.2 | length 4.1
  Top Layer w0.635: C48.1 R30.2@-6.66,53.903 ; -7.23,53.933 Q3.3
NetC49_1: C49.1 R33.1
NetC49_2: C49.2 Q4.2 R34.2 | length 1.9
  Top Layer w0.635: C49.2 9.315,60.7 R34.2
NetC50_1: C50.1 Q4.3 R35.2 | length 4.8
  Top Layer w0.381: C50.1 10.041,53.34 R35.2
  Top Layer w0.635: Q4.3 9.57,53.795 C50.1
NetC52_2: C52.2 U2.5 X1.1 | length 2.5
  Top Layer w0.203: C52.2 -11.624,14.672 U2.5
NetC53_2: C53.2 U2.6 X1.3 | length 5.3
  Top Layer w0.203: C53.2 -13.593,12.563 X1.3 -13.466,13.96 -11.561,13.96 -11.349,14.172 U2.6
NetD10_2: D10.2 R22.1 R23.2 | length 4.1
  Top Layer w0.635: R22.1 R23.2
NetLED3_1: LED3.1 U2.28 | length 8.7
  Top Layer w0.152: U2.28 -2.816,12.672 -2.163,13.325 -2.163,14.468 -1.975,14.656 -0.559,14.656 -0.127,14.224 -0.127,11.779 LED3.1
NetLED3_2: LED3.2 R6.1 | length 1.3
  Top Layer w0.254: R6.1 LED3.2
NetR2_1: R2.1 U2.2 U3.32 | length 18
  Top Layer w0.203: v1(-12.2,17.953) -12.2,17.907 R2.1 -12.446,17.258 -11.36,16.172 U2.2 ; U3.32 -5.878,27.354 v1(-5.878,25.15)
  Bottom Layer w0.203: v1(-12.2,17.953) -12.2,18.153 -11.6,18.753 -11.6,23.071 -9.521,25.15 v1(-5.878,25.15)
NetR3_1: R3.1 U2.3 U3.31 | length 20.3
  Top Layer w0.203: v1(-11.7,23.8) -11.916,23.584 -11.916,20.484 -13,19.4 -13.9,19.4 -14.3,19 -14.3,18.499 R3.1 -13.462,17.639 -11.495,15.672 U2.3 ; v1(-6.411,25.683) -6.38,25.714 U3.31
  Bottom Layer w0.203: v1(-11.7,23.8) -9.817,25.683 v1(-6.411,25.683)
NetR13_1: R13.1 U3.29 | length 1.2
  Top Layer w0.203: R13.1 U3.29@-7.388,28.23
NetR13_2: R13.2 U3.28 | length 1.2
  Top Layer w0.203: R13.2 U3.28@-7.888,28.23
NetR13_3: R13.3 U3.27 | length 1.2
  Top Layer w0.203: R13.3 U3.27@-8.388,28.23
NetR13_4: R13.4 U3.26 | length 1.2
  Top Layer w0.203: R13.4 U3.26@-8.888,28.23
NetR13_5: R13.5 U2.41 | length 9.7
  Top Layer w0.152: R13.5 -8.812,25.97 -8.812,24.471 -6.501,22.159 U2.41
NetR13_6: R13.6 U2.40 | length 9.7
  Top Layer w0.152: R13.6 -8.312,25.97 -8.312,24.678 -6.001,22.366 U2.40
NetR13_7: R13.7 U2.39 | length 9.7
  Top Layer w0.152: R13.7 -7.812,25.97 -7.812,24.885 -5.501,22.573 U2.39
NetR15_1: R15.1 U2.20 | length 1.1
  Top Layer w0.254: R15.1@-6.501,9.385 U2.20
NetR21_1: R21.1 SW3.2 | length 1.6
  Top Layer w0.152: R21.1@0.369,19.802 0.912,19.259 SW3.2
NetR102_1: R102.1 Y1.1 | length 1.4
  Top Layer w0.381: Y1.1 1.05,24.045 R102.1
NetU3_2: U3.2 Y1.3 | length 5.9
  Top Layer w0.152: U3.2 -5.13,29.485 -3.704,29.485 -3.302,29.083 v1(-3.302,26.543)
  Bottom Layer w0.152: v1(-3.302,26.543) v1(-1.905,26.543)
PA9: U2.30
PA10: U2.31
PA11: P4.4 U2.32 USB2.2 | length 31.6
  Top Layer w0.203: U2.32 -2.6,14.672 -2.286,14.986 v1(0.381,14.986)
  Bottom Layer w0.203: USB2.2 0.777,-2.047 0.102,-1.372 0.102,14.707 v1(0.381,14.986) 0.787,15.392 1.916,15.392 2.268,15.04 4.375,15.04 P4.4@5.575,16.241 ; P4.4@5.575,15.875 P4.4@5.575,16.241 ; P4.4 P4.4@5.575,16.241
PA12: P4.5 U2.33 USB2.3 | length 30.3
  Top Layer w0.203: U2.33 -2.862,15.172 -2.667,15.367 -1.016,15.367 -0.635,15.748 v1(-0.254,15.748)
  Bottom Layer w0.203: USB2.3 0.127,-1.905 -0.254,-1.524 v1(-0.254,15.748) 2.252,15.748 2.604,15.396 3.48,15.396 4.325,16.241 P4.5
PA13: P2.3 P4.3 pad.8 U2.34 | length 28
  Top Layer w0.203: P2.3 -7.962,6 ; -7.931,5.969 -7.9,6 pad.8 ; pad.8@-6.303,5 v1(-5.842,5.461) ; U2.34 -2.997,15.672 -2.794,15.875 v1(-1.524,15.875) -1.025,15.875 v1(-0.4,16.5)
  Bottom Layer w0.203: v1(-5.842,5.461) -5.842,6.666 -1.778,10.73 -1.778,15.621 v1(-1.524,15.875) ; v1(-0.4,16.5) 1.466,16.5 2.866,17.9 5.784,17.9 6.825,16.859 P4.3
PA14: P2.2 P4.2 pad.0 U2.37 | length 31.8
  Top Layer w0.152: P2.2 pad.0@-6.981,6.65 ; pad.0 v1(-4.699,6.731) ; U2.37 v1(-4.501,18.359)
  Bottom Layer w0.152: v1(-4.699,6.731) -4.699,6.985 -1.016,10.668 -1.016,16.624 ; v1(-4.501,18.359) -3.119,18.359 -1.38,16.62 -1.02,16.62 -1.016,16.624 ; P4.2 8.075,16.823 6.668,18.23 2.729,18.23 1.599,17.1 -0.54,17.1 -1.016,16.624
PA15: R13.8 U2.38 | length 9.7
  Top Layer w0.152: R13.8 -7.312,25.97 -7.312,25.092 -5.001,22.781 U2.38
SW: C29.1 D5.1 L1.2 U6.1 | length 8.4
  Top Layer w0.635: U6.1@7.866,8.982 L1.2 12.157,8.982 12.546,9.371 D5.1 12.546,12.038 C29.1
pads on no net: P2.4 SW3.3 SW3.4 U1.4 U2.4 U2.7 U2.10 U2.11 U2.12 U2.13 U2.14 U2.15 U2.16 U2.17 U2.18 U2.19 U2.21 U2.25 U2.26 U2.29 U2.42 U2.43 U2.45 U2.46 U3.4 U3.6 U3.14 U3.15 U3.16 U3.17 U3.18 U3.19 U3.20 U3.21 U4.4 U7.4 USB2.4

## Polygon pours and split planes (outlines as drawn)
GND on Top Layer "GND_L01_P010" (solid, remove dead copper, pour order 10): -17.264,42 ccw(c-15,42) -15,39.736 ccw(c-15,42) -12.736,42 ccw(c-15,42) -15,44.264 ccw(c-15,42)
GND on Top Layer "GND_L01_P012" (solid, remove dead copper, pour order 12): 17.264,42 ccw(c15,42) 15,44.264 ccw(c15,42) 12.736,42 ccw(c15,42) 15,39.736 ccw(c15,42)
GND on Bottom Layer "GND_L02_P008" (solid, remove dead copper, pour order 8): -15.399,19.558 15.367,19.558 15.367,-1.428 6,-10.795 -6,-10.795 -6,-10.383 -15.748,-0.635
GND on Bottom Layer "GND_L02_P014" (solid, remove dead copper, pour order 14): 13.4,62.2 16.329,62.2 15.029,1.5 11.836,1.5
GND on Bottom Layer "GND_L02_P018" (solid, remove dead copper, pour order 18): -12.165,1.6 -15.077,1.6 -16.329,62.3 -13.5,62.3

## Keep-outs
Keep-Out Layer:
  lines w0.152: -15.907,43.002 -16.254,58.8 -4.6,58.8 -4.6,62.3 -3.1,62.3 -3.1,58.8 4.9,58.8 4.9,62.3 6.5,62.3 6.5,58.8 16.246,58.8 15.862,42.981 ccw(c15,42) 15.838,40.998 ; -15.871,41.003 -15.032,1.5 -6.6,1.5 -2.2,1.5 -2.2,0.9 -4.5,0.9 -4.5,-10.795 4.5,-10.795 4.5,0.9 2.2,0.9 2.2,1.5 5.4,1.5 15.032,1.5 15.871,40.997 ; -15.862,42.981 cw(c-15,42) -15.829,40.99

## Silkscreen, mask and mechanical layers (free items; w line width, h text height)
Top Overlay:
  text "CLK" at -5.4,6.3 h1
  text "DIO" at -5.4,4.6 h1
Top Solder:
  lines w0.9: -15.248,40.015 ccw(c-15,42) -15.248,43.985 ; 15.248,40.015 cw(c15,42) 15.248,43.985
Bottom Solder:
  region: -16.256,58.8 -14.13,58.8 -12.903,1.5 -15.032,1.5
  region: 14.034,58.8 16.256,58.8 15.032,1.5 12.618,1.5

## Text inside footprints (layer, text, board x,y; h text height)
Q3: Top Overlay "1" at -11.4,57.5 h1.5 r90; Top Overlay "3" at -4,57.3 h1.5 r90
Q4: Top Overlay "1" at 5.3,57.5 h1.5 r90; Top Overlay "3" at 12.7,57.2 h1.5 r90
R13: Mechanical 1 "R1" at -8.337,26.367 h0.3
U3: Top Overlay "*" at -4.63,28.488 h1 r180